# EAGLE board Staircase lighting using PIR PCB (EAGLE 9.7.0)
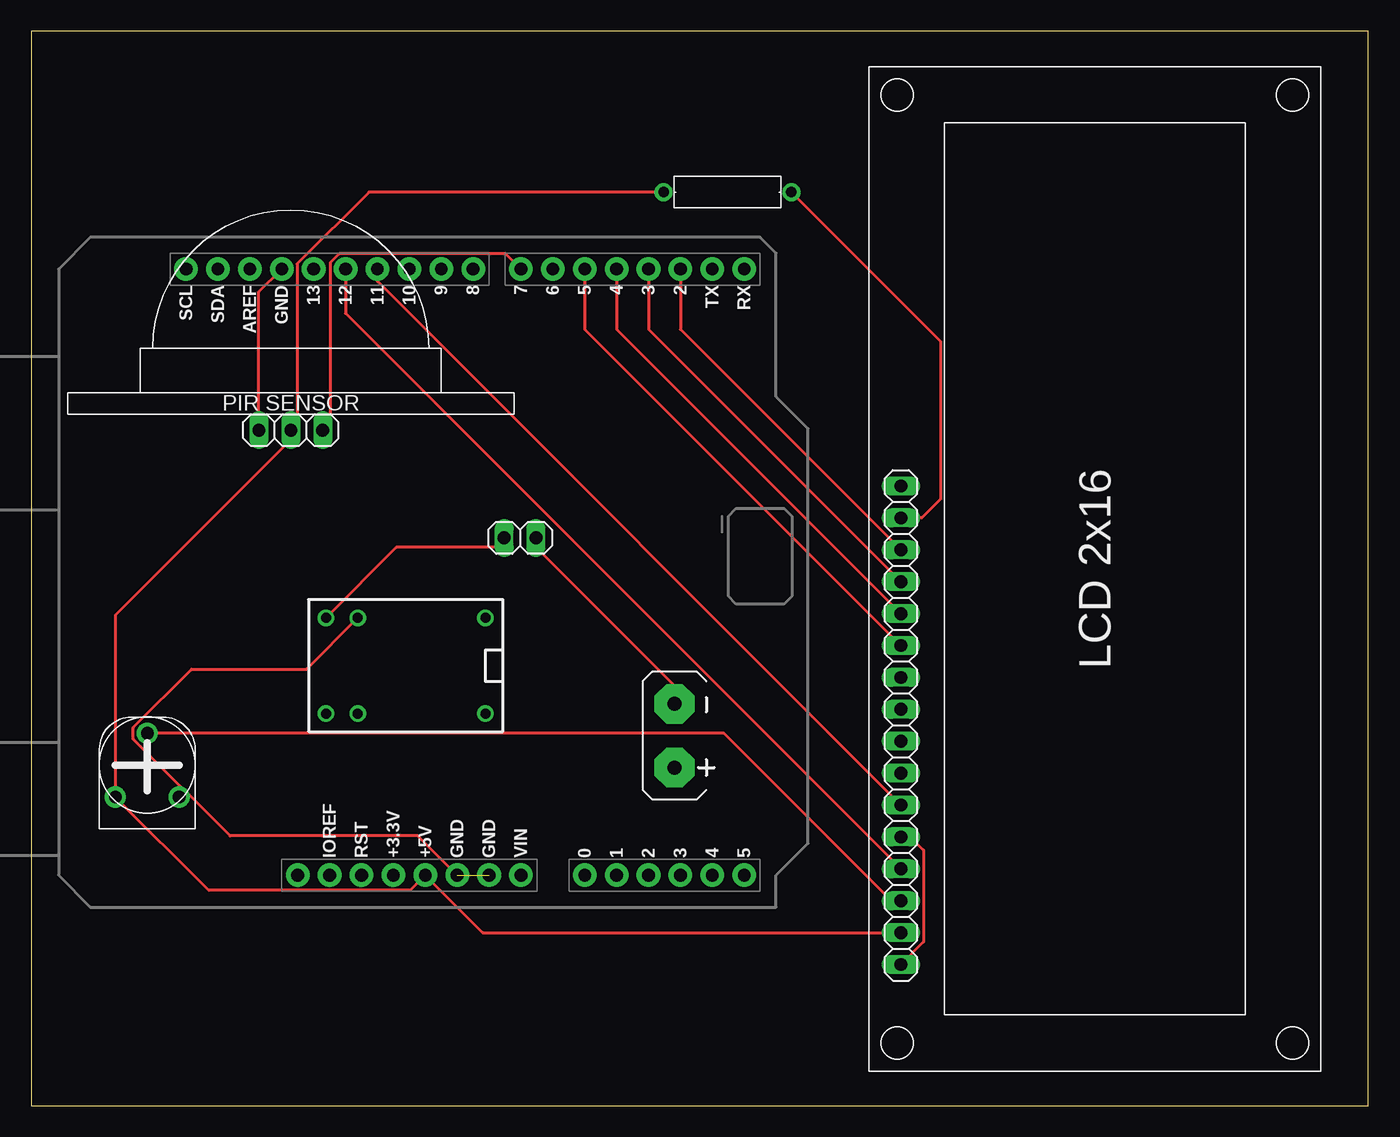
[diagram p0: board, top side]
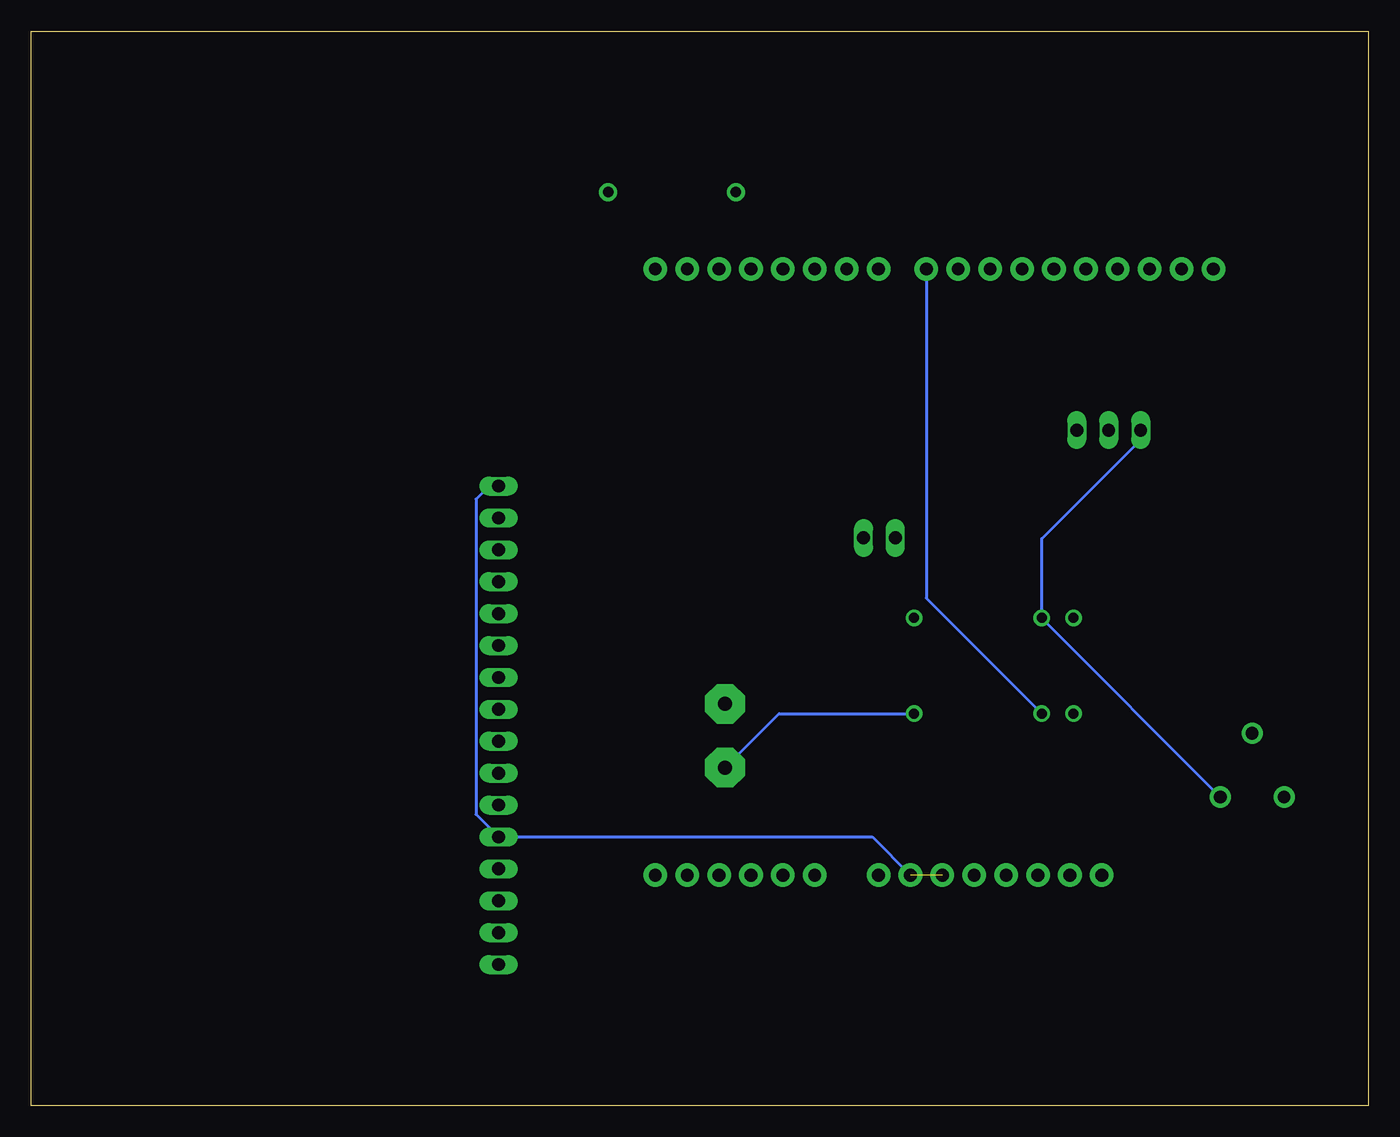
[diagram p1: board, bottom side, seen from below]

Size 106.47 x 85.53 mm. Coordinates in mm from the lower left corner, seen from the top.
Outline: 0,0 106.47,0 106.47,85.52 0,85.52 0,0
Copper layers (1*16): Top 0.035mm / dielectric 1.5mm / Bottom 0.035mm
Design rules "default": minimum track width 6mil, minimum drill 0.35mm, track to track 6mil, track to pad 6mil, pad to pad 6mil, via to via 6mil, smd to smd 6mil, copper to edge 40mil, drill to drill 6mil, minimum pad ring 10mil, minimum via ring 8mil, stop-mask expansion 4mil, vias tented up to drill 0mil, thermal gap 10mil

## Footprints (pad centres in the part's own frame; a part is rotated, then mirrored left to right if it is on the bottom)
BATTERY-GENERIC = drill 1.118 pad 3.15 octagon: + 2.54,0; - -2.54,0
LU-5-R = drill 0.8: 1 -6.35,-3.81; 5 3.81,-3.81; 6 6.35,-3.81; 7 6.35,3.81; 8 3.81,3.81; 12 -6.35,3.81
1X02 = drill 1.016 long: 1 -1.27,0; 2 1.27,0
28027 = drill 1.016 long: 1 -2.54,0; 2 0,0; 3 2.54,0
RESAD1016W63L850D250B = drill 0.83 pad 1.43: 1 -5.08,0; 2 5.08,0
HA-06-SM065 = drill 1 pad 1.676: 1 -2.54,-2.54; 2 0,2.54; 3 2.54,-2.54
ARDUINO-UNO-R3-SHIELD = drill 1.016 pad 1.88: 3.3V 24.13,-2.54; 5V 24.13,0; A0 24.13,12.7; A1 24.13,15.24; A2 24.13,17.78; A3 24.13,20.32; A4 24.13,22.86; A5 24.13,25.4; AREF -24.13,-13.97; D2 -24.13,20.32; D3 -24.13,17.78; D4 -24.13,15.24; D5 -24.13,12.7; D6 -24.13,10.16; D7 -24.13,7.62; D8 -24.13,3.81; D9 -24.13,1.27; D10 -24.13,-1.27; D11 -24.13,-3.81; D12 -24.13,-6.35; D13 -24.13,-8.89; GND@0 24.13,2.54; GND@1 24.13,5.08; GND@2 -24.13,-11.43; IOREF 24.13,-7.62; NC 24.13,-10.16; RES 24.13,-5.08; RX -24.13,25.4; SCL -24.13,-19.05; SDA -24.13,-16.51; TX -24.13,22.86; VIN 24.13,7.62
JHD-162A = drill 1.016 long: 1 -19.05,0; 2 -16.51,0; 3 -13.97,0; 4 -11.43,0; 5 -8.89,0; 6 -6.35,0; 7 -3.81,0; 8 -1.27,0; 9 1.27,0; 10 3.81,0; 11 6.35,0; 12 8.89,0; 13 11.43,0; 14 13.97,0; 15 16.51,0; 16 19.05,0

## Placement (x,y rotation side)
BAT1  9V  [BATTERY-GENERIC]  51.22,29.45 270 top
K1  RELAY-SPDT_LU-5-R  [LU-5-R]  29.81,35.02 180 top
L1  LIGHTBULB  [1X02]  38.92,45.2 0 top
PIR1  PIR-SENSOR_28027  [28027]  20.66,53.78 180 top
R1  220  [RESAD1016W63L850D250B]  55.44,72.73 0 top
RPOT2  250k  [HA-06-SM065]  9.23,27.11 0 top
U1  ARDUINO-UNO-R3-SHIELD  [ARDUINO-UNO-R3-SHIELD]  31.37,42.47 270 top
U2  LCD-16X2JHD-162A  [JHD-162A]  69.26,30.28 90 top

## Library data of the parts
BAT1 K1 L1 PIR1 R1 RPOT2 U1 U2 = Tinkercad

## Nets
BAT1+: BAT1.+ K1.12
BAT1-: BAT1.- L1.2
L1_1: K1.6 L1.1
U1_5V: PIR1.2 R1.1 RPOT2.1 U1.5V U2.2
U1_D2: U1.D2 U2.14
U1_D3: U1.D3 U2.13
U1_D4: U1.D4 U2.12
U1_D5: U1.D5 U2.11
U1_D7: PIR1.1 U1.D7
U1_D8: K1.8 U1.D8
U1_D11: U1.D11 U2.6
U1_D12: U1.D12 U2.4
U1_GND: K1.5 PIR1.3 RPOT2.3 U1.GND@0 U1.GND@1 U1.GND@2 U2.1 U2.5 U2.16
U2_LED+: R1.2 U2.15
U2_VO: RPOT2.2 U2.3

## Tracks (layer width: path | path; a pad name or v marks a point on that pad's centre or on a via)
BAT1+
  Bottom 0.254: BAT1.+ 46.92,31.21 K1.12
BAT1-
  Top 0.254: L1.2 40.19,44.44 51.22,33.41 BAT1.-
L1_1
  Top 0.254: L1.1 37.65,44.44 29.07,44.44 K1.6
U1_5V
  Top 0.254: U2.2 35.95,13.77 U1.5V 30.16,17.12 14.13,17.12 RPOT2.1 6.69,39.04 20.66,53.01 PIR1.2 20.66,54.54 21.16,55.04 21.16,67.01 26.89,72.73 R1.1
U1_D2
  Top 0.254: U1.D2 51.7,61.81 U2.14
U1_D3
  Top 0.254: U1.D3 49.16,61.81 U2.13
U1_D4
  Top 0.254: U1.D4 46.62,61.81 U2.12
U1_D5
  Top 0.254: U1.D5 44.08,61.81 U2.11
U1_D7
  Top 0.254: U1.D7 37.78,67.82 24.52,67.82 23.81,67.11 23.81,55.14 23.2,54.54 PIR1.1
U1_D8
  Bottom 0.254: U1.D8 35.19,40.39 K1.8
U1_D11
  Top 0.254: U1.D11 27.57,65.62 U2.6
U1_D12
  Top 0.254: U1.D12 25.03,63.08 U2.4
U1_GND  (1 unrouted)
  Top 0.254: U2.5 70.02,21.39 71.06,20.35 71.06,13.03 U2.1 | PIR1.3 18.12,54.54 18.12,64.78 U1.GND@2 | U1.GND@0 30.78,21.48 15.81,21.48 8.11,29.18 8.11,30.11 12.75,34.75 21.92,34.75 K1.5
  Bottom 0.254: PIR1.3 18.12,53.01 26,45.13 K1.5 26,38.8 RPOT2.3 | U1.GND@1 39.5,21.39 68.49,21.39 U2.5 71.06,23.19 71.06,48.29 70.02,49.33 U2.16
U2_LED+
  Top 0.254: R1.2 72.39,60.87 72.39,48.26 70.92,46.79 U2.15
U2_VO
  Top 0.254: U2.3 68.49,16.31 55.16,29.65 RPOT2.2